# EAGLE board TTR1 Gr4 - SIMON Timothée Testeur Multi (EAGLE 7.6.0)
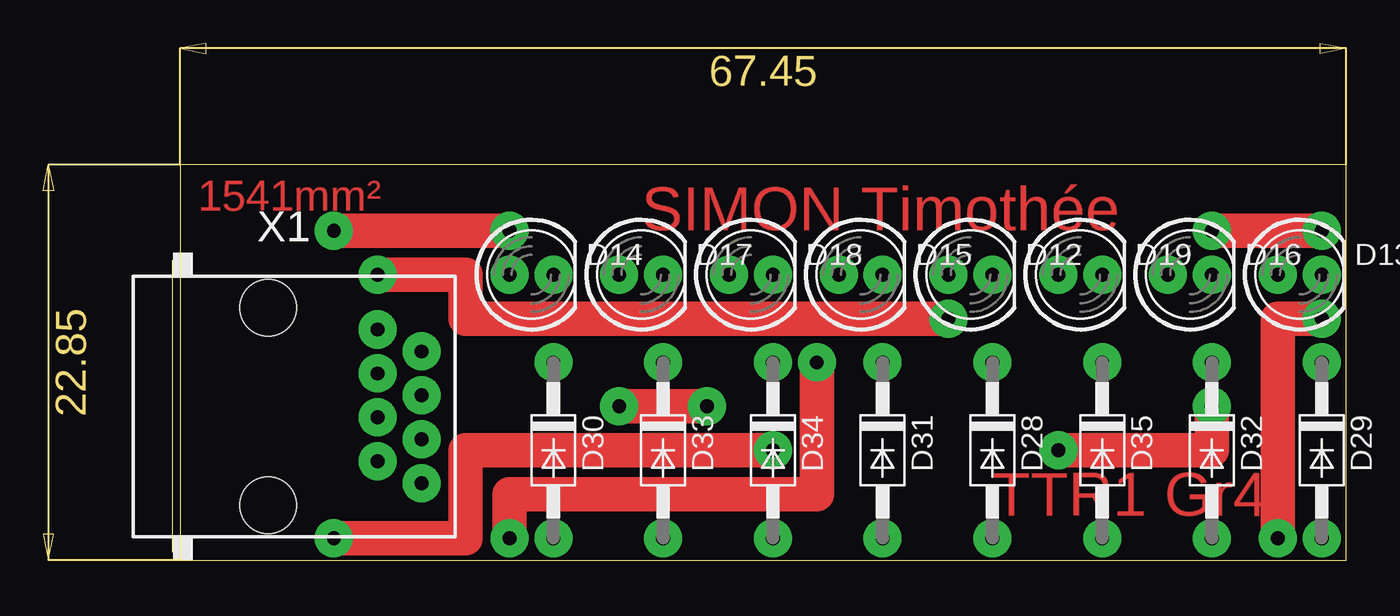
[diagram p0: board, top side]
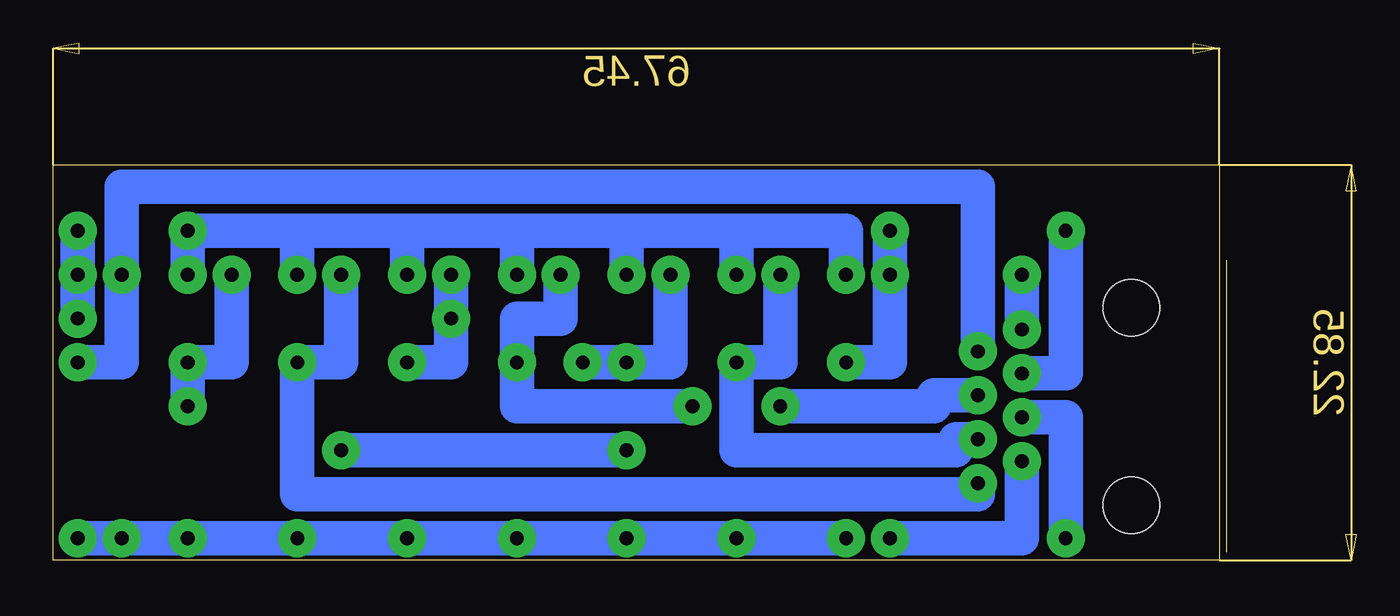
[diagram p1: board, bottom side, seen from below]

Size 67.45 x 22.85 mm. Coordinates in mm from the lower left corner, seen from the top.
Outline: 0,0 67.45,0 67.45,22.85 0,22.85 0,0
Copper layers (1*16): Top 0.035mm / dielectric 1.5mm / Bottom 0.035mm
Design rules "default": minimum track width 10mil, minimum drill 24mil, track to track 8mil, track to pad 8mil, pad to pad 8mil, via to via 8mil, smd to smd 8mil, copper to edge 40mil, drill to drill 8mil, minimum pad ring 10mil, minimum via ring 8mil, stop-mask expansion 4mil, vias tented up to drill 0mil, thermal gap 10mil
Net classes: 0 default: width 2 mm, drill 0.8 mm, clearance 0.2 mm

## Footprints (pad centres in the part's own frame; a part is rotated, then mirrored left to right if it is on the bottom)
LED5MM = drill 0.813 pad 2.2: A -1.27,0; K 1.27,0
DO41-10 = drill 0.8 pad 2.2: A 5.08,0; C -5.08,0
RJ45-NO-SHIELD = drill 0.8 pad 2.2: 1 -4.445,6.35; 2 -3.175,8.89; 3 -1.905,6.35; 4 -0.635,8.89; 5 0.635,6.35; 6 1.905,8.89; 7 3.175,6.35; 8 4.445,8.89 | hole 3.251: -5.715,0; 5.715,0

## Placement (x,y rotation side)
D12  [LED5MM]  45.72,16.51 0 top
D13  [LED5MM]  64.77,16.51 0 top
D14  [LED5MM]  20.32,16.51 0 top
D15  [LED5MM]  39.37,16.51 0 top
D16  [LED5MM]  58.42,16.51 0 top
D17  [LED5MM]  26.67,16.51 0 top
D18  [LED5MM]  33.02,16.51 0 top
D19  [LED5MM]  52.07,16.51 0 top
D28  1N4004  [DO41-10]  46.99,6.35 270 top
D29  1N4004  [DO41-10]  66.04,6.35 270 top
D30  1N4004  [DO41-10]  21.59,6.35 270 top
D31  1N4004  [DO41-10]  40.64,6.35 270 top
D32  1N4004  [DO41-10]  59.69,6.35 270 top
D33  1N4004  [DO41-10]  27.94,6.35 270 top
D34  1N4004  [DO41-10]  34.29,6.35 270 top
D35  1N4004  [DO41-10]  53.34,6.35 270 top
X1  RJ45-6L-B  [RJ45-NO-SHIELD]  5.08,8.89 270 top

## Library data of the parts
D12-D19 = led
D28-D35 = diode
X1 = con-tycoelectronics; MPN: RJ45-6L-B; OC_FARNELL: unknown; OC_NEWARK: 16R6090

## Nets
N$1: D12.K D13.K D14.K D15.K D16.K D17.K D18.K D19.K D28.A D29.A D30.A D31.A D32.A D33.A D34.A D35.A
N$2: D12.A D28.C X1.1
N$3: D13.A D29.C X1.2
N$5: D14.A D30.C X1.3
N$6: D15.A D31.C X1.4
N$7: D16.A D32.C X1.5
N$8: D17.A D33.C X1.6
N$9: D18.A D34.C X1.7
N$10: D19.A D35.C X1.8

## Tracks (layer width: path | path; a pad name or v marks a point on that pad's centre or on a via)
N$1  (via drill 0.8 pad 2.2)
  Top 2: v59.69,19.05 v66.04,19.05 | v63.5,1.27 63.5,13.97 v66.04,13.97
  Bottom 2: D14.K 21.59,19.05 27.94,19.05 | 27.94,19.05 34.29,19.05 | 34.29,19.05 40.64,19.05 | 40.64,19.05 46.99,19.05 | 46.99,19.05 53.34,19.05 | 53.34,19.05 v59.69,19.05 D16.K | D30.A D33.A D34.A D31.A D28.A D35.A D32.A v63.5,1.27 D29.A | v66.04,19.05 D13.K v66.04,13.97 | D17.K 27.94,19.05 | D18.K 34.29,19.05 | D15.K 40.64,19.05 | D12.K 46.99,19.05 | D19.K 53.34,19.05
N$2  (via drill 0.8 pad 2.2)
  Top 2: v44.45,13.97 16.51,13.97 16.51,16.51 v11.43,16.51
  Bottom 2: v11.43,16.51 X1.1 | D12.A v44.45,13.97 44.45,11.43 D28.C
N$3
  Bottom 2: X1.2 13.97,21.59 63.5,21.59 D13.A 63.5,11.43 D29.C
N$5  (via drill 0.8 pad 2.2)
  Top 2: v8.89,19.05 v19.05,19.05
  Bottom 2: X1.3 8.89,10.8 v8.89,19.05 | v19.05,19.05 D14.A 19.05,11.43 D30.C
N$6  (via drill 0.8 pad 2.2)
  Top 2: v25.4,8.89 v30.48,8.89
  Bottom 2: X1.4 16.51,9.52 16.51,8.89 v25.4,8.89 | v30.48,8.89 40.64,8.89 D31.C 40.64,13.97 38.1,13.97 D15.A
N$7  (via drill 0.8 pad 2.2)
  Top 2: v8.89,1.27 16.51,1.27 16.51,6.35 v34.29,6.35 | v50.8,6.35 59.69,6.35 v59.69,8.89
  Bottom 2: X1.5 8.89,8.26 v8.89,1.27 | v34.29,6.35 v50.8,6.35 | v59.69,8.89 D32.C 57.15,11.43 D16.A
N$8
  Bottom 2: X1.6 15.24,6.98 15.24,6.35 27.94,6.35 D33.C 25.4,11.43 D17.A
N$9  (via drill 0.8 pad 2.2)
  Top 2: v19.05,1.27 19.05,3.81 36.83,3.81 v36.83,11.43
  Bottom 2: X1.7 11.43,1.27 v19.05,1.27 | v36.83,11.43 D34.C 31.75,11.43 D18.A
N$10
  Bottom 2: X1.8 13.97,3.81 53.34,3.81 D35.C 50.8,11.43 D19.A

## Text on the board
Top: 1541mm² | SIMON Timothée | TTR1 Gr4